# EAGLE board solenoidcontroller (EAGLE 7.3.0)
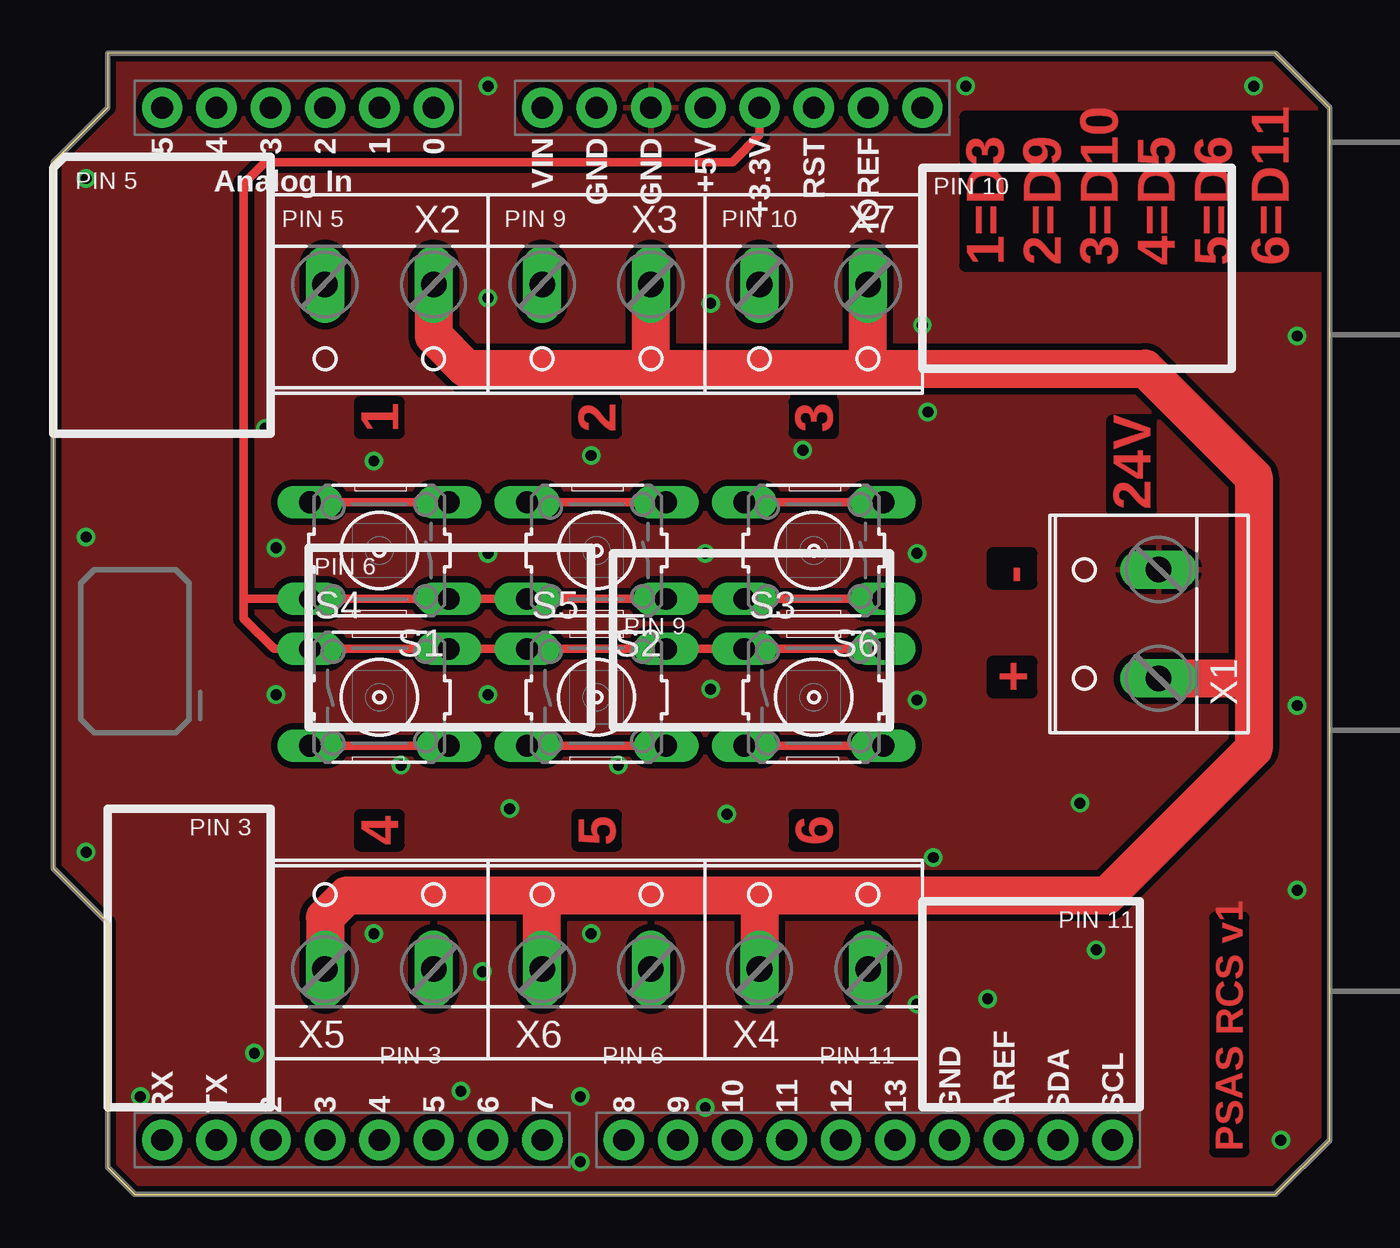
[diagram p0: board, top side]
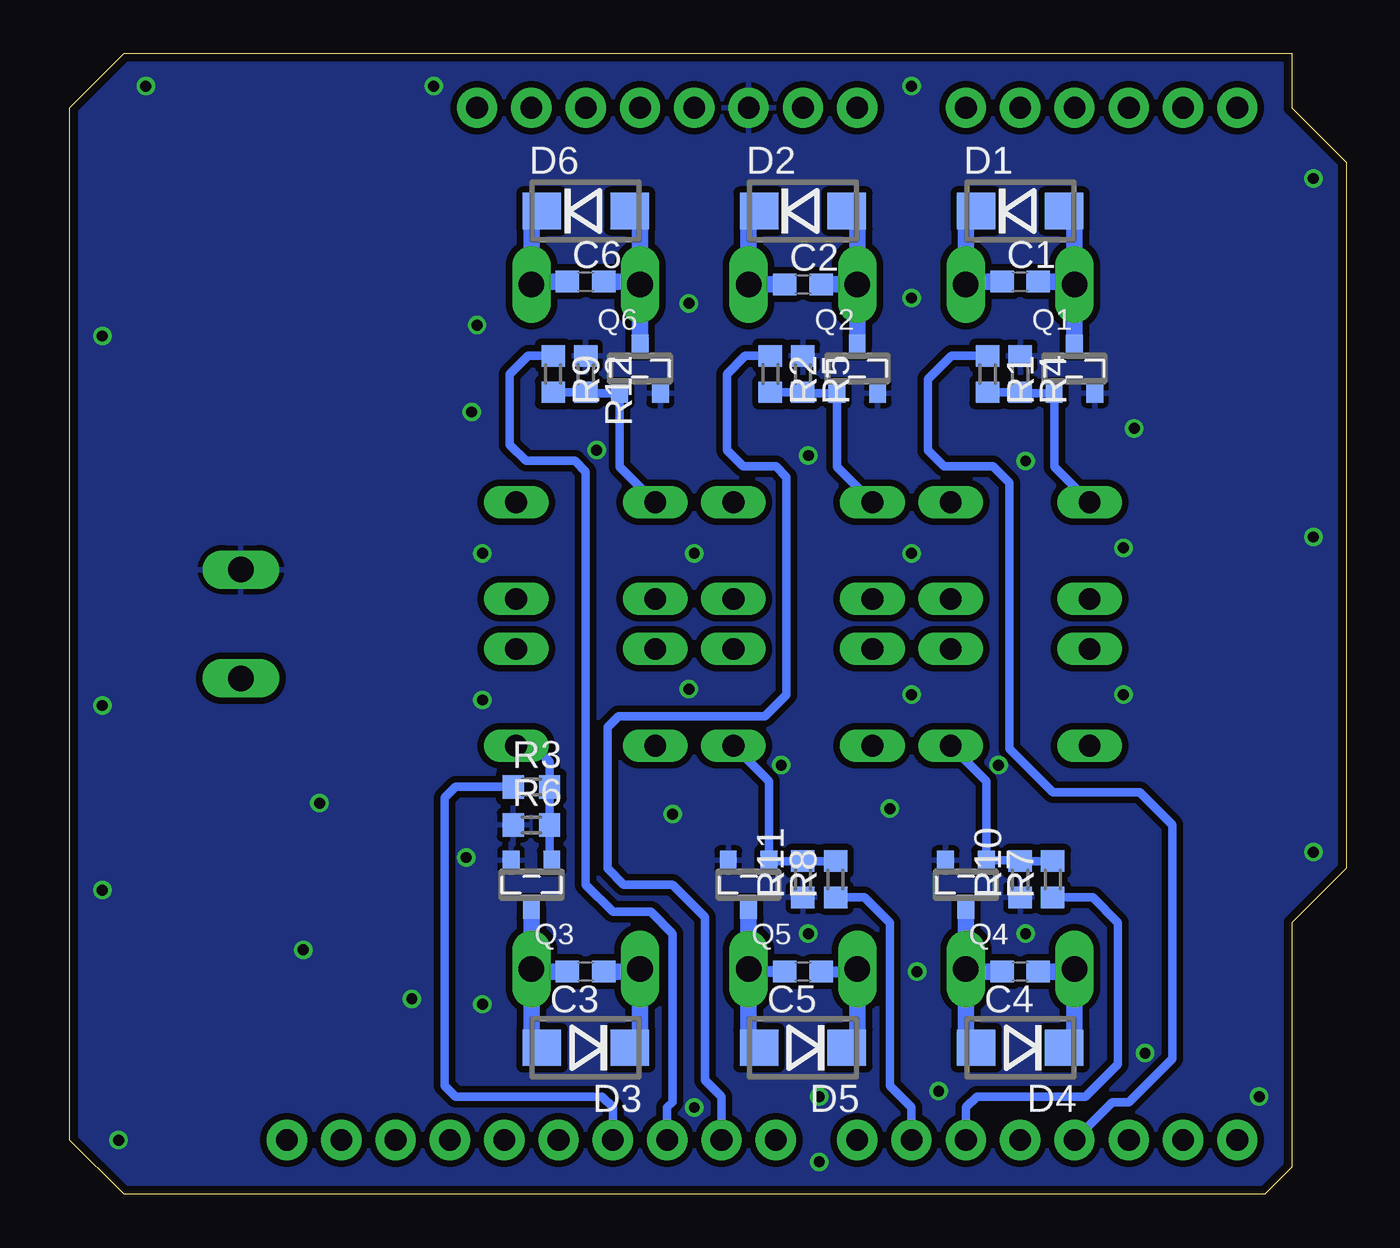
[diagram p1: board, bottom side, seen from below]

Size 59.69 x 53.34 mm. Coordinates in mm from the lower left corner, seen from the top.
Outline: 3.81,0 57.15,0 59.69,2.54 59.69,50.8 57.15,53.34 2.54,53.34 2.54,50.8 0,48.26 0,15.24 2.54,12.7 2.54,1.27 3.81,0
Copper layers (1*16): Top 0.0356mm / dielectric 1.5011mm / Bottom 0.0356mm
Design rules "osh-park-2layer *": minimum track width 6mil, minimum drill 13mil, track to track 6mil, track to pad 6mil, pad to pad 6mil, via to via 6mil, smd to smd 6mil, copper to edge 15mil, drill to drill 6mil, minimum pad ring 7mil, minimum via ring 7mil, stop-mask expansion 4mil, vias tented up to drill 30mil, thermal gap 10mil

## Footprints (pad centres in the part's own frame; a part is rotated, then mirrored left to right if it is on the bottom)
C0603 = smd 1.1 x 1: 1 -0.85,0; 2 0.85,0
DO214BA = smd 1.8 x 1.7: A 2.05,0; C -2.05,0
UNO_R3_SHIELD = drill 1.016 pad 1.88: 3.3V 50.8,26.67; 5V 50.8,29.21; A0 50.8,41.91; A1 50.8,44.45; A2 50.8,46.99; A3 50.8,49.53; A4 50.8,52.07; A5 50.8,54.61; AREF 2.54,15.24; D2 2.54,49.53; D3 2.54,46.99; D4 2.54,44.45; D5 2.54,41.91; D6 2.54,39.37; D7 2.54,36.83; D8 2.54,33.02; D9 2.54,30.48; D10 2.54,27.94; D11 2.54,25.4; D12 2.54,22.86; D13 2.54,20.32; GND@0 50.8,31.75; GND@1 50.8,34.29; GND@2 2.54,17.78; IOREF 50.8,21.59; NC 50.8,19.05; RES 50.8,24.13; RX 2.54,54.61; SCL 2.54,10.16; SDA 2.54,12.7; TX 2.54,52.07; VIN 50.8,36.83
SOT23 = smd 0.787 x 0.889: 1 -0.953,-1.143; 2 0.953,-1.143; 3 0,1.143
R0603 = smd 1 x 1.1: 1 -0.85,0; 2 0.85,0
B3F-10XX = drill 1.016 long: 1 -3.251,2.261; 2 3.251,2.261; 3 -3.251,-2.261; 4 3.251,-2.261
W237-132 = drill 1.194 long: 1 -2.54,-0.635; 2 2.54,-0.635

## Placement (x,y rotation side)
C1  [C0603]  15.24,42.67 0 bottom
C2  [C0603]  25.4,42.55 0 bottom
C3  [C0603]  35.56,10.41 180 bottom
C4  [C0603]  15.24,10.41 180 bottom
C5  [C0603]  25.4,10.41 180 bottom
C6  [C0603]  35.56,42.67 0 bottom
D1  [DO214BA]  15.24,45.97 0 bottom
D2  [DO214BA]  25.4,45.97 0 bottom
D3  [DO214BA]  35.56,6.86 180 bottom
D4  [DO214BA]  15.24,6.86 180 bottom
D5  [DO214BA]  25.4,6.86 180 bottom
D6  [DO214BA]  35.56,45.97 0 bottom
J1  ARDUINO_R3_SHIELD  [UNO_R3_SHIELD]  59.69,0 90 top
Q1  PMV45EN  [SOT23]  12.7,38.61 0 bottom
Q2  PMV45EN  [SOT23]  22.86,38.61 0 bottom
Q3  PMV45EN  [SOT23]  38.1,14.48 180 bottom
Q4  PMV45EN  [SOT23]  17.78,14.48 180 bottom
Q5  PMV45EN  [SOT23]  27.94,14.48 180 bottom
Q6  PMV45EN  [SOT23]  33.02,38.61 0 bottom
R1  100  [R0603]  16.76,38.35 270 bottom
R2  100  [R0603]  26.92,38.35 270 bottom
R3  100  [R0603]  38.1,19.05 0 bottom
R4  10k  [R0603]  15.24,38.35 270 bottom
R5  10k  [R0603]  25.4,38.35 270 bottom
R6  10k  [R0603]  38.1,17.27 0 bottom
R7  100  [R0603]  13.72,14.73 90 bottom
R8  100  [R0603]  23.88,14.73 90 bottom
R9  100  [R0603]  37.08,38.35 270 bottom
R10  10k  [R0603]  15.24,14.73 90 bottom
R11  10k  [R0603]  25.4,14.73 90 bottom
R12  10k  [R0603]  35.56,38.35 270 bottom
S1  [B3F-10XX]  15.24,30.1 180 top
S2  [B3F-10XX]  25.4,30.1 180 top
S3  [B3F-10XX]  35.56,23.24 0 top
S4  [B3F-10XX]  15.24,23.24 0 top
S5  [B3F-10XX]  25.4,23.24 0 top
S6  [B3F-10XX]  35.56,30.1 180 top
X1  [W237-132]  51.05,26.67 90 top
X2  [W237-132]  15.24,41.91 180 top
X3  [W237-132]  25.4,41.91 180 top
X4  [W237-132]  35.56,11.18 0 top
X5  [W237-132]  15.24,11.18 0 top
X6  [W237-132]  25.4,11.18 0 top
X7  [W237-132]  35.56,41.91 180 top

## Library data of the parts
C1-C6 = rcl
D1-D6 = diode
J1 = SparkFun-Boards
Q1-Q6 = Q_PMV45EN_N_ch_MOSFET
R1-R12 = resistor
S1-S6 = switch-omron; MPN: B3F-1000; OC_FARNELL: 176432; OC_NEWARK: 36M3542
X1-X7 = con-wago-508; OC_FARNELL: unknown; OC_NEWARK: unknown

## Nets
1: J1.D3 R1.1
2: J1.D9 R2.1
3: J1.D10 R9.1
4: J1.D5 R7.1
5: J1.D6 R8.1
6: J1.D11 R3.1
+3V3: J1.3.3V S1.1 S1.2 S2.1 S2.2 S3.1 S3.2 S4.1 S4.2 S5.1 S5.2 S6.1 S6.2
+24V: C1.1 C2.1 C3.1 C4.1 C5.1 C6.1 D1.C D2.C D3.C D4.C D5.C D6.C X1.1 X2.1 X3.1 X4.1 X5.1 X6.1 X7.1
GND: J1.GND@0 Q1.2 Q2.2 Q3.2 Q4.2 Q5.2 Q6.2 R4.1 R5.1 R6.1 R10.1 R11.1 R12.1 X1.2
N$1: Q2.1 R2.2 R5.2 S2.3 S2.4
N$2: Q3.1 R3.2 R6.2 S3.3 S3.4
N$3: C2.2 D2.A Q2.3 X3.2
N$4: C3.2 D3.A Q3.3 X4.2
N$5: Q1.1 R1.2 R4.2 S1.3 S1.4
N$6: C1.2 D1.A Q1.3 X2.2
N$7: Q4.1 R7.2 R10.2 S4.3 S4.4
N$8: C4.2 D4.A Q4.3 X5.2
N$9: Q5.1 R8.2 R11.2 S5.3 S5.4
N$10: C5.2 D5.A Q5.3 X6.2
N$11: Q6.1 R9.2 R12.2 S6.3 S6.4
N$12: C6.2 D6.A Q6.3 X7.2

## Tracks (layer width: path | path; a pad name or v marks a point on that pad's centre or on a via)
1
  Bottom 0.406: R1.1 18.45,39.2 19.56,38.1 19.56,34.8 18.8,34.04 16.51,34.04 15.75,33.27 15.75,20.83 13.72,18.8 9.65,18.8 8.13,17.27 8.13,6.35 10.16,4.32 10.92,4.32 J1.D3
2
  Bottom 0.406: R2.1 28.11,39.2 28.96,38.35 28.96,34.8 28.19,34.04 26.67,34.04 26.16,33.53 26.16,23.37 27.18,22.35 34.04,22.35 34.54,21.84 34.54,15.24 33.78,14.48 31.5,14.48 29.97,12.95 29.97,5.33 29.21,4.57 J1.D9
3
  Bottom 0.406: R9.1 38.27,39.2 39.12,38.35 39.12,35.05 38.35,34.29 36.07,34.29 35.56,33.78 35.56,14.48 34.29,13.21 32.51,13.21 31.5,12.19 31.5,4.32 31.75,4.06 J1.D10
4
  Bottom 0.406: R7.1 11.85,13.88 10.67,12.7 10.67,6.1 12.19,4.57 17.27,4.57 17.78,4.06 J1.D5
5
  Bottom 0.406: R8.1 22.52,13.88 21.34,12.7 21.34,5.08 20.32,4.06 J1.D6
6
  Bottom 0.406: R3.1 41.66,19.05 42.16,18.54 42.16,5.08 41.66,4.57 34.8,4.57 34.29,4.06 J1.D11
+3V3
  Top 0.406: S3.2 S3.1 S5.2 S5.1 S4.2 S4.1 10.31,25.5 8.89,26.92 8.89,27.94 | S6.1 S6.2 S2.1 S2.2 S1.1 S1.2 8.99,27.84 8.89,27.94 | J1.3.3V 33.02,49.53 31.75,48.26 9.91,48.26 8.89,47.24 8.89,27.94
+24V
  Top 0.406: 17.78,42.42 X2.1
  Top 1.778: 17.78,42.42 17.78,40.13 19.3,38.61 28.19,38.61 | 28.19,38.61 38.35,38.61 | 33.02,13.97 22.86,13.97 | 22.86,13.97 13.72,13.97 12.7,12.95 X5.1 | X6.1 22.86,13.97 | 33.02,13.97 X4.1 | 38.35,38.61 38.1,38.86 X7.1 | 28.19,38.61 27.94,38.86 X3.1 | 38.35,38.61 51.05,38.61 56.13,33.53 56.13,24.13 | 56.13,24.13 56.13,20.83 49.28,13.97 33.02,13.97 | X1.1 56.13,24.13
  Bottom 0.406: 27.94,45.48 D2.C | 12.95,10.41 12.83,10.41 X5.1 | X2.1 17.78,42.67 | 37.85,42.67 38.1,42.67 X7.1
  Bottom 0.508: D1.C 17.78,45.48 | D6.C 37.61,45.96 38.1,45.47 | X6.1 22.86,10.41 C5.1 | 22.86,7.35 D5.C
  Bottom 0.762: 17.78,45.48 17.78,42.67 C1.1 | C6.1 37.85,42.67 | 38.1,45.47 X7.1 38.1,42.42 | 22.86,10.41 22.86,7.35 | X4.1 33.02,10.41 | 33.02,10.41 33.02,7.35 D3.C | C3.1 33.02,10.41 | X5.1 12.7,7.35 D4.C | C4.1 12.95,10.41 | 27.94,45.48 X3.1 C2.1
GND  (via drill 0.51)
  other vias: 48.77,11.43 57.4,2.54 4.06,4.57 1.52,16 1.52,47.5 20.32,51.82 42.67,51.82 56.13,51.82 58.17,40.13 58.17,22.86 58.17,14.22 41.15,15.75 31.5,17.78 26.42,20.07 21.34,18.03 16.26,20.07 9.91,35.81 30.73,41.66 35.05,34.8 25.15,34.54 14.99,34.29 10.41,30.23 20.32,29.97 30.48,29.97 40.39,29.97 40.39,23.11 30.73,23.62 20.32,23.37 10.41,23.37 19.05,4.83 30.48,4.06 1.52,30.73 20.32,41.91 40.64,40.64 40.89,36.58 40.39,8.89 24.64,4.57 24.64,1.52 48.01,18.29 25.15,12.19 14.99,12.19 9.4,6.6 20.07,10.41 43.69,9.14
  pour Bottom (isolate 0.305): 2.54,53.34 2.54,50.8 0,48.26 0,15.24 2.54,12.7 2.54,1.27 3.81,0 57.15,0 59.69,2.54 59.69,50.8 57.15,53.34
  pour Top (isolate 0.305): 2.54,53.34 2.54,50.8 0,48.26 0,15.24 2.54,12.7 2.54,1.27 3.81,0 57.15,0 59.69,2.54 59.69,50.8 57.15,53.34
N$1
  Top 0.406: S2.4 S2.3
  Bottom 0.406: S2.4 23.81,34.02 Q2.1 25.36,37.47 R5.2 R2.2
N$2
  Top 0.406: S3.3 S3.4
  Bottom 0.406: Q3.1 37.25,15.72 R6.2 R3.2 37.25,20.23 37.85,20.83 38.66,20.83 S3.4
N$3
  Bottom 0.406: 22.86,45.48 D2.A
  Bottom 0.762: X3.2 22.86,45.48 | C2.2 X3.2 | Q2.3 X3.2
N$4
  Bottom 0.762: 38.1,10.41 X4.2 Q3.3 | 38.1,10.41 38.1,7.35 D3.A | C3.2 38.1,10.41
N$5
  Top 0.406: S1.4 S1.3
  Bottom 0.406: S1.4 13.65,34.02 Q1.1 15.2,37.47 R4.2 R1.2
N$6
  Bottom 0.508: D1.A 12.7,45.48 | 12.7,42.67 X2.2
  Bottom 0.762: 12.7,45.48 12.7,42.67 C1.2 | Q1.3 X2.2
N$7
  Top 0.406: S4.3 S4.4
  Bottom 0.406: R7.2 R10.2 15.28,15.62 Q4.1 16.83,19.32 S4.4
N$8
  Bottom 0.762: 17.78,10.41 X5.2 Q4.3 | 17.78,10.41 17.78,7.35 D4.A | C4.2 17.78,10.41
N$9
  Top 0.406: S5.3 S5.4
  Bottom 0.406: R8.2 R11.2 26.95,15.58 Q5.1 26.99,19.32 S5.4
N$10
  Bottom 0.508: X6.2 27.94,10.41 | 27.94,7.35 D5.A | C5.2 27.94,10.41 | 28.19,10.41 27.94,10.41
  Bottom 0.762: 27.94,10.41 27.94,7.35 | Q5.3 X6.2
N$11
  Top 0.406: S6.4 S6.3
  Bottom 0.406: S6.4 33.97,34.02 Q6.1 35.52,37.47 R12.2 R9.2
N$12
  Bottom 0.508: 33.15,42.67 X7.2 | D6.A 33.51,45.96 33.02,45.47
  Bottom 0.762: C6.2 33.15,42.67 | 33.02,45.47 X7.2 Q6.3

## Text on the board
Top: 1=D3 / 2=D9 / 3=D10 / 4=D5 / 5=D6 / 6=D11 | 1 | 2 | 3 | 24V | - | + | 4 | 5 | 6 | PSAS RCS v1
tNames: PIN 5 | PIN 10 | PIN 5 | PIN 9 | PIN 10 | PIN 6 | PIN 9 | PIN 3 | PIN 11 | PIN 3 | PIN 6 | PIN 11